# Altium PCB Light Control - 8-16 in 16-32 out.PcbDoc
Units mm, origin at the board's own origin, x right, y up, seen from the top; angles counter-clockwise.
Board outline 152.4 x 101.6 mm, 2 copper layers (Top Layer, Bottom Layer); 58 components, 41 nets, 190 pads, 30 vias.
Unrouted connection lines stored in the file: 1.
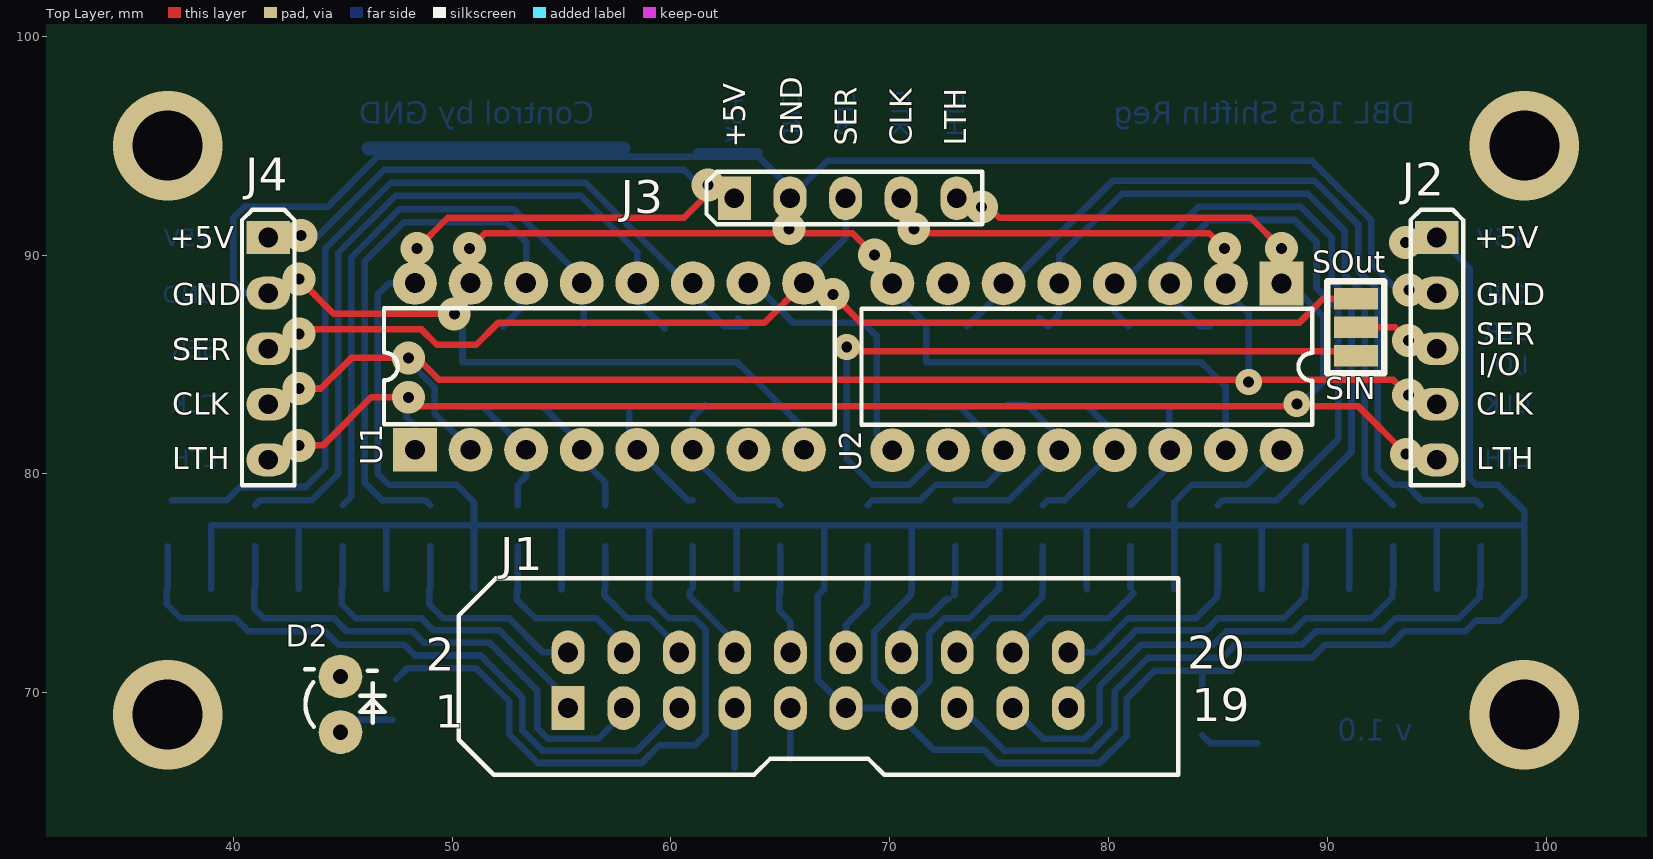
[diagram p0: Top Layer view]
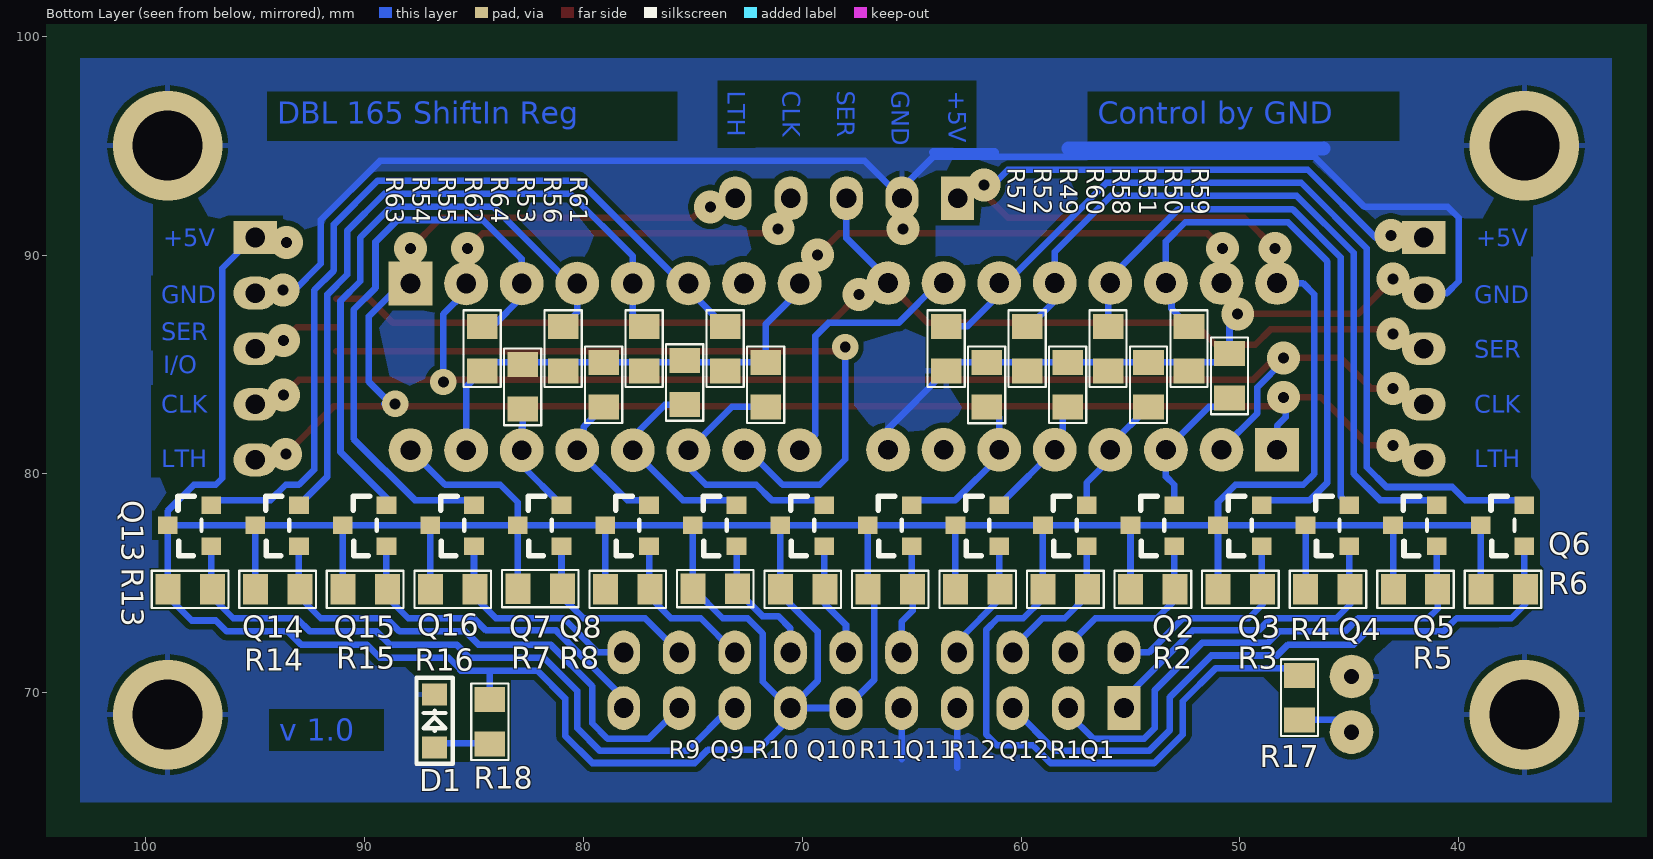
[diagram p1: Bottom Layer view, seen from below]
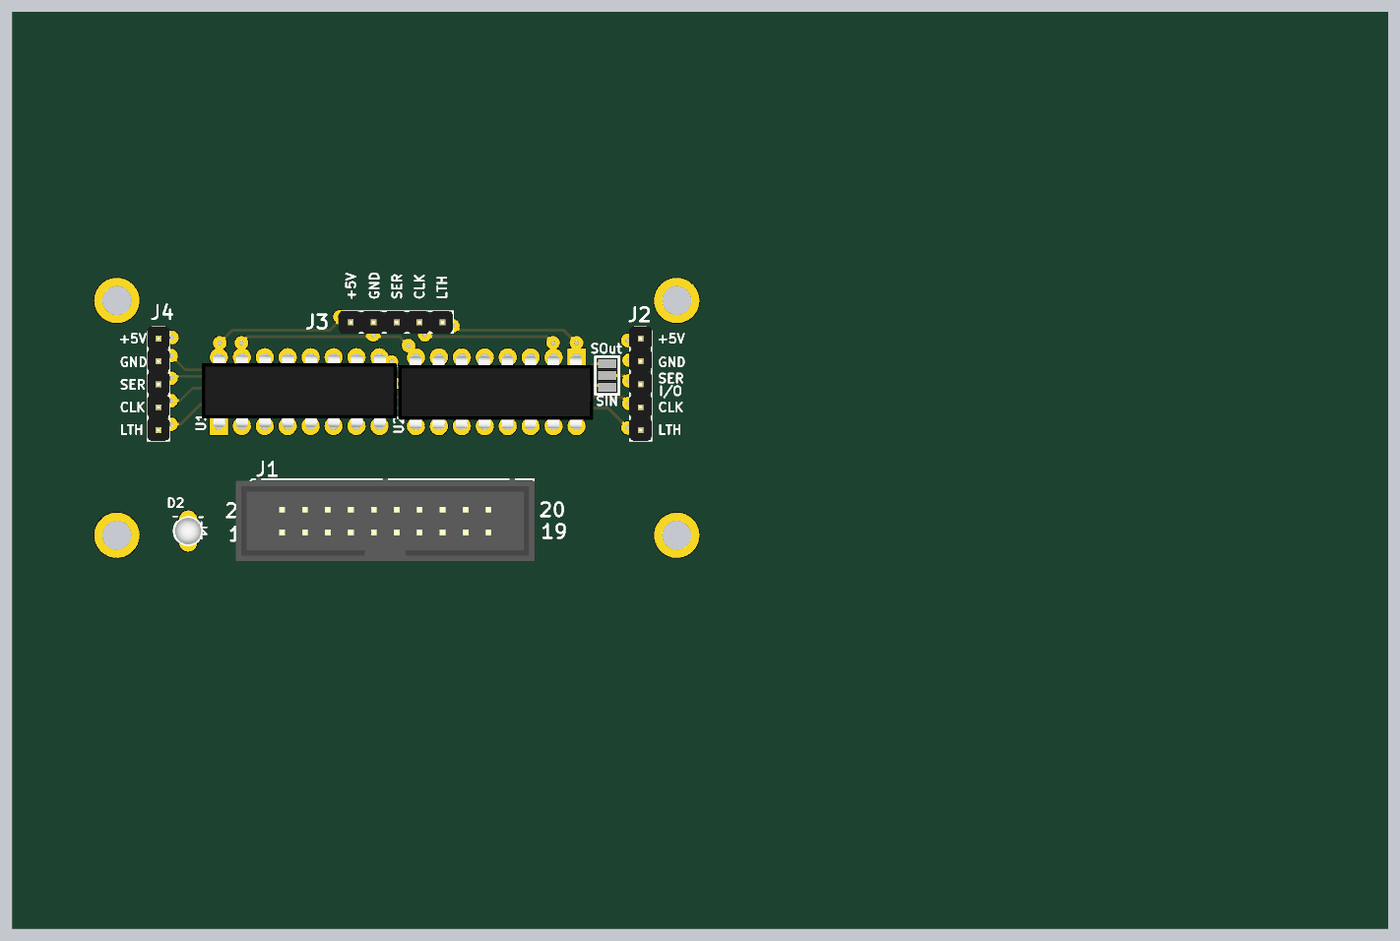
[diagram p2: 3D render of the assembled board from above, using the file's embedded part models]
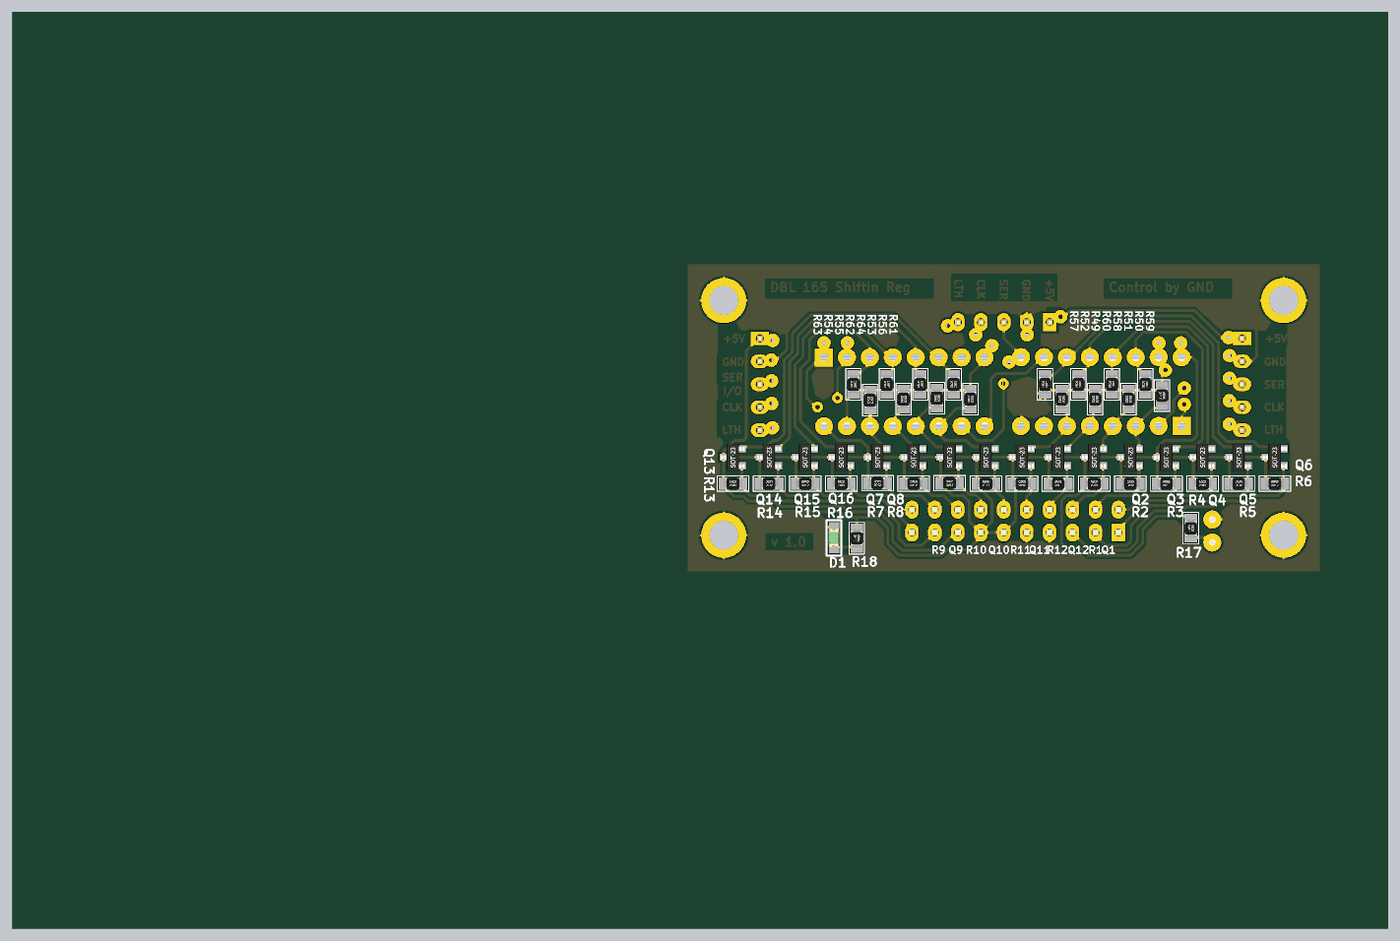
[diagram p3: 3D render of the assembled board from below, using the file's embedded part models]

## Layer stack, top to bottom
Top Solder: solder mask 0.0102, Solder Resist, Dk 3.5
Top Layer: signal copper 0.0356
Dielectric 1: dielectric 0.32, FR-4, Dk 4.8
Bottom Layer: signal copper 0.0356
Bottom Solder: solder mask 0.0102, Solder Resist, Dk 3.5

## Board outline
25.4,25.4 177.8,25.4 177.8,127 25.4,127

## Design rules (kind name [scope] priority, off if disabled: settings)
Clearance [All] p1: gap=0.254
ComponentClearance [All] p1: gap=0.1 collisioncheckmode=3 verticalgap=0.01 showdistances=FALSE
PolygonConnect [All] p1: connectstyle=Relief reliefconductorwidth=0.254 reliefentries=4 polygonreliefangle="90 Angle" airgapwidth=0.254
RoutingVias [All] p1: holewidth=0.711 width=1.27 viastyle="Through Hole" minholewidth=0.711 minwidth=1.27 maxholewidth=0.711 maxwidth=1.27
SolderMaskExpansion [All] p1: expansion=0.102
Width [All] p1: maxlimit=2 minlimit=0.2 preferedwidth=0.5
28 further rules are at their usual default settings.

## Components (designator, comment, footprint, x,y, rotation, side; value= is the part's Value field where it differs from the comment)
D1 "Green" "LED SMD 0805 Green" 86.8,67.5 r90 bottom
D2 "FYL-3014GD" "LED Round 3mm Green" 44.9,68.2 r90 top
J1 "Input Buttons/keys" "LINE 2.54 x 20D (2 x 10) - BH" 55.3,69.3 r90 top
J2 "Interface Connector" "Line 2.54 x 5" 95,90.8 r0 top
J3 "Interface Connector" "Line 2.54 x 5" 62.9,92.6 r90 top
J4 "Interface Connector" "Line 2.54 x 5" 41.6,90.8 r0 top
Q1 "BSS84" SOT-23 57,76.7 r90 bottom
Q2 "BSS84" SOT-23 53,76.7 r90 bottom
Q3 "BSS84" SOT-23 49,76.7 r90 bottom
Q4 "BSS84" SOT-23 45,76.7 r90 bottom
Q5 "BSS84" SOT-23 41,76.7 r90 bottom
Q6 "BSS84" SOT-23 37,76.7 r90 bottom
Q7 "BSS84" SOT-23 81,76.7 r90 bottom
Q8 "BSS84" SOT-23 77,76.7 r90 bottom
Q9 "BSS84" SOT-23 73,76.7 r90 bottom
Q10 "BSS84" SOT-23 69,76.7 r90 bottom
Q11 "BSS84" SOT-23 65,76.7 r90 bottom
Q12 "BSS84" SOT-23 61,76.7 r90 bottom
Q13 "BSS84" SOT-23 97,76.7 r90 bottom
Q14 "BSS84" SOT-23 93,76.7 r90 bottom
Q15 "BSS84" SOT-23 89,76.7 r90 bottom
Q16 "BSS84" SOT-23 85,76.7 r90 bottom
R1 "10kOm" "SMD 0805 (2012)" 59,74.7 r180 bottom
R2 "10kOm" "SMD 0805 (2012)" 55,74.7 r180 bottom
R3 "10kOm" "SMD 0805 (2012)" 51,74.7 r180 bottom
R4 "10kOm" "SMD 0805 (2012)" 47,74.7 r180 bottom
R5 "10kOm" "SMD 0805 (2012)" 43,74.7 r180 bottom
R6 "10kOm" "SMD 0805 (2012)" 39,74.7 r180 bottom
R7 "10kOm" "SMD 0805 (2012)" 83,74.734 r180 bottom
R8 "10kOm" "SMD 0805 (2012)" 79,74.7 r180 bottom
R9 "10kOm" "SMD 0805 (2012)" 75,74.734 r180 bottom
R10 "10kOm" "SMD 0805 (2012)" 71,74.7 r180 bottom
R11 "10kOm" "SMD 0805 (2012)" 67,74.7 r180 bottom
R12 "10kOm" "SMD 0805 (2012)" 63,74.7 r180 bottom
R13 "10kOm" "SMD 0805 (2012)" 99,74.7 r180 bottom
R14 "10kOm" "SMD 0805 (2012)" 95,74.7 r180 bottom
R15 "10kOm" "SMD 0805 (2012)" 91,74.7 r180 bottom
R16 "10kOm" "SMD 0805 (2012)" 87,74.7 r180 bottom
R17 "4.7k Om" "SMD 0805 (2012)" 47.3,70.8 r270 bottom
R18 "4.7k Om" "SMD 0805 (2012)" 84.3,69.7 r270 bottom
R49 "10kOm" "SMD 0805 (2012)" 59.7,84.7 r90 bottom
R50 "10kOm" "SMD 0805 (2012)" 52.3,84.7 r90 bottom
R51 "10kOm" "SMD 0805 (2012)" 54.2,85.1 r270 bottom
R52 "10kOm" "SMD 0805 (2012)" 61.6,85.091 r270 bottom
R53 "10kOm" "SMD 0805 (2012)" 75.4,85.2 r270 bottom
R54 "10kOm" "SMD 0805 (2012)" 82.8,85 r270 bottom
R55 "10kOm" "SMD 0805 (2012)" 80.9,84.7 r90 bottom
R56 "10kOm" "SMD 0805 (2012)" 73.5,84.7 r90 bottom
R57 "10kOm" "SMD 0805 (2012)" 63.4,84.7 r90 bottom
R58 "10kOm" "SMD 0805 (2012)" 56,84.7 r90 bottom
R59 "10kOm" "SMD 0805 (2012)" 50.5,85.5 r270 bottom
R60 "10kOm" "SMD 0805 (2012)" 57.9,85.1 r270 bottom
R61 "10kOm" "SMD 0805 (2012)" 71.7,85.1 r270 bottom
R62 "10kOm" "SMD 0805 (2012)" 79.1,85.1 r270 bottom
R63 "10kOm" "SMD 0805 (2012)" 84.6,84.7 r90 bottom
R64 "10kOm" "SMD 0805 (2012)" 77.2,84.7 r90 bottom
U1 "SN74HC165N" DIP-16 48.3,81.1 r0 top
U2 "SN74HC165N" DIP-16 87.9,88.7 r180 top

## Footprints (in the part's own frame and the unit in brackets; to place one, negate y for a bottom-side part, rotate by r counter-clockwise, add the part's x,y. Pads: shape width x height; smd on the part's side, far side on the other; paste and mask are expansions set on the pad)
DIP-16 [mm] "DIP; 16 Leads; Row Spacing 7.62 mm; Pitch 2.54 mm"
  rect 2x2 hole 0.9: 1(0,0)
  round 2 hole 0.9: 2(2.54,0) 3(5.08,0) 4(7.62,0) 5(10.16,0) 6(12.7,0) 7(15.24,0) 8(17.78,0) 9(17.78,7.62) 10(15.24,7.62) 11(12.7,7.62) 12(10.16,7.62) 13(7.62,7.62) 14(5.08,7.62) 15(2.54,7.62) 16(0,7.62)
  silkscreen extent -1.41,1.16 19.19,6.46, body extent -1.87,-0.05 19.72,7.83, height 4.19
"LED Round 3mm Green" [mm]
  round 2 hole 0.7: A(0,0) K(2.54,0)
  silkscreen extent 0.25,-2.03 2.88,1.63, body extent -0.39,-1.65 2.91,1.64, height 5.51
"LED SMD 0805 Green" [mm]
  rect 1x1.143 smd: A(0,0) K(2.425,0)
  silkscreen extent -0.75,-0.82 3.17,0.83, body extent 0.22,-0.62 2.24,0.63, height 1.1
"Line 2.54 x 5" [mm]
  rect 2x1.5 hole 0.9: 1(0,0)
  oval 2x1.5 hole 0.9: 2(0,-2.54) 3(0,-5.08) 4(0,-7.62) 5(0,-10.16)
  silkscreen extent -1.2,-11.32 1.2,1.28, body extent -1.25,-11.33 1.25,1.37, height 8.2
"LINE 2.54 x 20D (2 x 10) - BH" [mm]
  rect 2x1.5 hole 0.9: 1(0,0)
  oval 2x1.5 hole 0.9: 2(2.54,0) 3(0,-2.54) 4(2.54,-2.54) 5(0,-5.08) 6(2.54,-5.08) 7(0,-7.62) 8(2.54,-7.62) 9(0,-10.16) 10(2.54,-10.16) 11(0,-12.7) 12(2.54,-12.7) 13(0,-15.24) 14(2.54,-15.24) 15(0,-17.78) 16(2.54,-17.78) 17(0,-20.32) 18(2.54,-20.32) 19(0,-22.86) 20(2.54,-22.86)
  silkscreen extent -3.05,-27.87 5.92,5, body extent -3.18,-27.95 6.02,5.1, height 8.84
"SMD 0805 (2012)" [mil]
  rect 45x55 smd: 1(0.35,0.98) 2(80.35,0.98)
  silkscreen extent -29,-32 109,34, body extent 1,-24 80,26, height 18
SOT-23 [mm]
  rect 0.8x0.9 smd: 1(0,0) 2(1.875,0) 3(0.95,2)
  silkscreen extent -0.45,0.45 2.27,1.53, body extent -0.57,-0.32 2.43,2.32, height 1.08

## Part data
D1: library part "Led SMD Green", "?2v ?20mA"
D2: library part "Led Round 3mm Green", "2.1v 10mA, 15-30mCd"
J1: library part "PLD-20 (2 x 10)", "Vert, Dbl line, Male"
J2 J3 J4: library part PLS-5, "Vert, Sgl line, Male"
Q1 Q2 Q3 Q4 Q5 Q6 Q7 Q8 Q9 Q10 Q11 Q12 Q13 Q14 Q15 Q16: "P-Channel -50V - 10-1? - 0.13A"
R1 R2 R3 R4 R5 R6 R7 R8 R9 R10 R11 R12 R13 R14 R15 R16 R17 R18 R49 R50 R51 R52 R53 R54 R55 R56 R57 R58 R59 R60 R61 R62 R63 R64: library part "Res All Types"
U1 U2: "8-Bit Parallel-Load Shift Register"

## Free pads (board coordinates)
  rect 2x1 smd: 2(91.3,88) 3(91.3,85.4) 4(91.3,86.7)

## Via types
v1: diameter 1.5, hole 0.5, Top Layer to Bottom Layer, 23 vias
v2: diameter 5, hole 3.2, Top Layer to Bottom Layer, 4 vias
v3: diameter 1.2, hole 0.5, Top Layer to Bottom Layer, 3 vias

## Nets (pads, with @x,y where several pads share a name; then routed paths per layer and width w, separated by ;. In a path a pad name is that pad's centre, name@x,y a point inside that pad or via, vN(x,y) a via of type N, cw(c..) or ccw(c..) an arc to the next point about the centre after c; other vN are vias at no path point)
165TO165: U1.10 U2.9 | length 12.4
  Bottom Layer w0.3: U1.10 63.78,88.72 65.6,86.9 68.8,86.9 69.4,86.3 69.4,81.8 U2.9
+5V: J1.11 J1.13 J2.1 J3.1 J4.1 Q1.3 Q2.3 Q3.3 Q4.3 Q5.3 Q6.3 Q7.3 Q8.3 Q9.3 Q10.3 Q11.3 Q12.3 Q13.3 Q14.3 Q15.3 Q16.3 R1.1 R2.1 R3.1 R4.1 R5.1 R6.1 R7.1 R8.1 R9.1 R10.1 R11.1 R12.1 R13.1 R14.1 R15.1 R16.1 R17.1 R18.1 U1.16 U2.16 | length 265.9
  Top Layer w0.3: v1(48.4,90.3) 49.8,91.7 60.6,91.7 61.7,92.8 v1(61.7,93.2)
  Bottom Layer w0.3: R6.1@39,74.734 Q6.3 Q5.3 ; J4.1 43.8,90.8 46.9,93.9 60.6,93.9 61.7,92.8 v1(61.7,93.2) ; R5.1@43,74.734 Q5.3 ; R4.1@47,74.734 Q4.3 ; R17.1@47.45,70.616 47.957,71.123 51.093,71.123 52.609,69.608 52.609,68.091 53.9,66.8 53.912,66.8 53.924,66.788 58.651,66.788 59.463,67.6 61.1,67.6 61.6,68.1 61.6,72.867 61.067,73.4 59.9,73.4 58.991,74.309 R1.1 ; U1.16 47.12,88.72 46.6,88.2 46.6,80 47.1,79.5 50.2,79.5 51,78.7 Q3.3 ; R3.1@51,74.734 Q3.3 ; R2.1@55,74.734 Q2.3 ; R1.1@59,74.734 Q1.3 ; R12.1@63,74.734 Q12.3 ; R11.1 66.7,74.434 66.7,70.6 J1.11 70.1,69.3 72,67.4 74.3,67.4 74.912,66.788 79.588,66.788 80.837,68.037 80.837,69.737 82.1,71 84.3,71 ; R11.1@67,74.734 Q11.3 ; J1.13 69.3,70.54 69.3,72.8 70.991,74.491 R10.1 ; J1.13@70.7,69.4 71.8,70.5 71.8,72.7 72.5,73.4 73.632,73.4 R9.1 ; R10.1@71,74.734 Q10.3 ; R9.1@75,74.734 Q9.3 ; R8.1@79,74.734 Q8.3 ; R7.1@83,74.734 Q7.3 ; R18.1@84.275,70.091 84.275,70.975 84.3,71 ; R16.1@87,74.734 Q16.3 ; U2.16 86.32,79.5 83.8,79.5 83,78.7 Q7.3 ; R15.1@91,74.734 Q15.3 ; R14.1@95,74.734 Q14.3 ; J2.1@95,90.4 95.5,90.4 96.5,89.4 96.5,79.8 96.8,79.5 97.8,79.5 99,78.3 Q13.3 ; R13.1 98.991,74.391 97.9,73.3 96.8,73.3 96.3,72.8 93.5,72.8 92.9,72.2 89.9,72.2 89.3,71.6 86.157,71.6 85.624,71.067 85.624,71.025 85.6,71 84.3,71 ; R13.1@99,74.734 Q13.3 ; Q5.3 Q4.3 ; Q4.3 Q3.3 ; Q3.3 Q2.3 ; Q2.3 Q1.3 ; Q1.3 Q12.3 ; Q12.3 Q11.3 ; Q11.3 Q10.3 ; Q10.3 Q9.3 ; Q9.3 Q8.3 ; Q8.3 Q7.3 ; Q7.3 Q16.3 ; Q16.3 Q15.3 ; Q15.3 Q14.3 ; Q14.3 Q13.3
  other v1: 93.575,90.575 43.1,90.9
"BT 1": J1.5 Q6.1 R6.2 | length 30.5
  Bottom Layer w0.3: R6.2 36.959,74.041 37.6,73.4 40.1,73.4 40.7,72.8 44.2,72.8 44.8,72.2 47.8,72.2 48.3,71.7 51.3,71.7 53.2,69.8 53.2,68.295 54.153,67.342 58.422,67.342 J1.5 ; R6.2@37,74.766 Q6.1
"BT 2": J1.3 Q5.1 R5.2 | length 23.9
  Bottom Layer w0.3: R5.2 40.959,73.841 41.4,73.4 44.6,73.4 45.2,72.8 48.2,72.8 48.708,72.292 51.708,72.292 53.9,70.1 53.9,68.379 54.383,67.896 56.696,67.896 57.84,69.04 J1.3 ; R5.2@41,74.766 Q5.1
"BT 3": J1.1 Q4.1 R4.2 | length 15.2
  Bottom Layer w0.3: R4.2 44.959,74.041 45.6,73.4 48.6,73.4 49.154,72.846 52.154,72.846 55.3,69.7 J1.1 ; R4.2@45,74.766 Q4.1
"BT 4": J1.2 Q3.1 R3.2 | length 9.9
  Bottom Layer w0.3: R3.2 48.959,74.041 49.6,73.4 52.6,73.4 54.16,71.84 J1.2 ; R3.2@49,74.766 Q3.1
"BT 5": J1.4 Q2.1 R2.2 | length 8.9
  Bottom Layer w0.3: R2.2 52.959,74.241 53.8,73.4 56.6,73.4 57.8,72.2 J1.4@57.8,71.6 ; R2.2@53,74.541 Q2.1
"BT 6": J1.6 Q1.1 R1.2 | length 6.8
  Bottom Layer w0.3: R1.2 56.959,74.441 58,73.4 59.025,73.4 60.38,72.045 J1.6 ; R1.2@57,74.766 Q1.1
"BT 7": J1.8 Q12.1 R12.2 | length 5.6
  Bottom Layer w0.3: R12.2@60.859,74.625 60.859,74.391 62.92,72.33 J1.8 ; R12.2@61,74.766 Q12.1
"BT 8": J1.10 Q11.1 R11.2 | length 5.3
  Bottom Layer w0.3: R11.2 64.959,73.741 65.46,73.24 J1.10 ; R11.2@65,74.541 Q11.1
"BT 9": J1.12 Q10.1 R10.2 | length 5.2
  Bottom Layer w0.3: J1.12 68,73.1 68.959,74.059 R10.2 ; R10.2@69,74.766 Q10.1
"BT 10": J1.14 Q9.1 R9.2 | length 6.3
  Bottom Layer w0.3: J1.14 70.54,72.94 71.1,73.5 71.817,73.5 72.617,74.3 R9.2@72.7,74.3 ; J1.14@70.7,72.3 J1.14@71,72.3 ; R9.2@72.959,74.459 R9.2 ; R9.2@73,74.8 Q9.1
"BT 11": J1.16 Q8.1 R8.2 | length 7.2
  Bottom Layer w0.3: J1.16 74.64,73.4 76,73.4 76.959,74.359 R8.2 ; R8.2@77,74.766 Q8.1
"BT 12": J1.18 Q7.1 R7.2 | length 8.6
  Bottom Layer w0.3: J1.18 77.18,73.4 80,73.4 R7.2@81.159,74.559 ; R7.2@81,74.8 Q7.1
"BT 13": J1.20 Q16.1 R16.2 | length 10.1
  Bottom Layer w0.3: J1.20 79.34,71.84 80.9,73.4 84,73.4 84.959,74.359 R16.2 ; R16.2@85,74.766 Q16.1
"BT 14": J1.19 Q15.1 R15.2 | length 15.5
  Bottom Layer w0.3: J1.19 78.16,69.76 81.246,72.846 84.446,72.846 85,73.4 88,73.4 88.959,74.359 R15.2 ; R15.2@89,74.766 Q15.1
"BT 15": J1.17 Q14.1 R14.2 | length 23.9
  Bottom Layer w0.3: J1.17 77.024,67.896 78.896,67.896 79.6,68.6 79.6,70.3 81.5,72.2 84.8,72.2 85.4,72.8 88.4,72.8 89,73.4 92,73.4 92.959,74.359 R14.2 ; R14.2@93,74.766 Q14.1
"BT 16": J1.15 Q13.1 R13.2 | length 30.9
  Bottom Layer w0.3: J1.15 73.3,69.3 75.258,67.342 79.242,67.342 80.283,68.383 80.283,70.083 81.8,71.6 85.2,71.6 85.8,72.2 88.854,72.2 89.454,72.8 92.5,72.8 93.1,73.4 96,73.4 96.959,74.359 R13.2 ; R13.2@97,74.766 Q13.1
CLK165: J2.4 J3.4 J4.4 U1.2 U2.2 | length 76.6
  Top Layer w0.3: v1(43,83.9) 44,83.9 45.4,85.3 v1(48,85.3) ; v1@48.2,85.5 49.4,84.3 93,84.3 v1(93.7,83.6) ; v1(71.1,91.2) 71.3,91 84.6,91 v1(85.3,90.3)
  Bottom Layer w0.3: v1@47.975,85.188 49.2,83.963 49.2,82.771 50.84,81.131 U1.2 ; U2.2 85.36,88.34 86.4,87.3 v3(86.4,84.2)
GND: D1.K D2.K J1.7 J1.9 J2.2 J3.2 J4.2 R49.1 R50.1 R51.1 R52.1 R53.1 R54.1 R55.1 R56.1 R57.1 R58.1 R59.1 R60.1 R61.1 R62.1 R63.1 R64.1 U1.8 U1.15 U2.8 U2.15 | length 156.3
  Top Layer w0.3: v1(43,88.9) 44.584,87.316 49.436,87.316 U1.15 ; v1(50.8,90.3) 51.5,91 68.3,91 v1(69.3,90)
  Bottom Layer w0.3: J4.2 40.54,88.26 40,88.8 40,91.7 40.5,92.2 44.3,92.2 46.6,94.5 64,94.5 65.44,93.06 J3.2 67.14,94.3 89.3,94.3 92,91.6 92,89.6 v1@93.3,88.3 ; U1.15@50.475,87.825 50.475,85.091 R51.1 R60.1 63.043,85.091 R57.1 66.08,82.054 U1.8 ; U1.15@50.84,88.035 U1.15 ; 62.92,66.57 J1.7 ; 65.46,66.96 J1.9 ; U2.8@70.12,89.38 U2.8 70.12,88.38 71.675,86.825 R61.1 R62.1 84.243,85.091 R63.1 85.36,83.974 U2.15 U2.15@85.36,81.79
  Bottom Layer w0.4: 61.2,94.7 64,94.7
  Bottom Layer w0.65: 46.191,94.873 57.827,94.873
  other v1: 50.1,87.3 93.725,88.4 65.4,91.2
  other v2: 37,69 99,69 37,95 99,95
"IN 1": Q6.2 R57.2 U1.11 | length 41.6
  Bottom Layer w0.3: Q6.2@37.2,78.8 39.7,78.8 40.3,79.4 43.3,79.4 44.2,80.3 44.2,90.3 47.2,93.3 56.1,93.3 60.68,88.72 U1.11 61,88.2 62.459,86.741 R57.2 R57.2@63.066,87.1
"IN 2": Q5.2 R49.2 U1.12 | length 34.3
  Bottom Layer w0.3: Q5.2 41.225,78.8 43.6,78.8 44.8,80 44.8,90.1 47.4,92.7 55.9,92.7 58.46,90.14 U1.12 58.46,87.906 59.725,86.641 R49.2@59.725,86.655
"IN 3": Q4.2 R58.2 U1.13 | length 26.4
  Bottom Layer w0.3: Q4.2 45.4,78.975 45.4,89.9 47.6,92.1 52.8,92.1 55.92,88.98 U1.13 ; R58.2@56.025,86.841 U1.13@56.025,88.72
"IN 4": Q3.2 R50.2 U1.14 | length 26.3
  Bottom Layer w0.3: Q3.2 48.775,78.8 46.8,78.8 46,79.6 46,89.7 47.8,91.5 52.5,91.5 53.38,90.62 U1.14 53.125,88.465 53.125,87.541 R50.2
"IN 5": Q2.2 R59.2 U1.3 | length 6.5
  Bottom Layer w0.3: R59.2@50.621,83.059 50.475,83.059 51.421,83.059 U1.3 53.38,79.88 53,79.5 Q2.2
"IN 6": Q1.2 R51.2 U1.4 | length 5.7
  Bottom Layer w0.3: R51.2 55.92,81.314 U1.4 55.92,80.68 57,79.6 Q1.2
"IN 7": Q12.2 R60.2 U1.5 | length 5.5
  Bottom Layer w0.3: U1.5@58.1,81.056 R60.2@58.1,82.8 ; U1.5@58.675,81.315 U1.5 60.76,78.8 Q12.2@61,78.8
"IN 8": Q11.2 R52.2 U1.6 | length 7.5
  Bottom Layer w0.3: R52.2@61.575,83.159 61,82.584 U1.6 61,80.8 63,78.8 64.775,78.8 Q11.2
"IN 9": Q10.2 R61.2 U2.11 | length 12
  Bottom Layer w0.3: Q10.2 69.225,78.8 71.4,78.8 72.1,79.5 74.4,79.5 75.2,80.3 U2.11 73.221,83.059 R61.2
"IN 10": Q9.2 R53.2 U2.12 | length 9.3
  Bottom Layer w0.3: Q9.2@73,78.8 75.46,78.8 U2.12 77.74,81.694 76.275,83.159 R53.2
"IN 11": Q8.2 R62.2 U2.13 | length 6.8
  Bottom Layer w0.3: Q8.2 77.225,78.8 78,78.8 U2.13 79.975,81.385 79.975,82.159 R62.2
"IN 12": Q7.2 R54.2 U2.14 | length 5.2
  Bottom Layer w0.3: Q7.2 82.82,80.395 U2.14 82.82,82.104 82.775,82.059 R54.2
"IN 13": Q16.2 R63.2 U2.3 | length 28.1
  Bottom Layer w0.3: R63.2 84.159,86.741 82.82,88.08 U2.3 82.82,89.82 84.6,91.6 88.5,91.6 89.5,90.6 89.5,88.5 90.5,87.5 90.5,81.6 87.7,78.8 85.225,78.8 Q16.2
"IN 14": Q15.2 R55.2 U2.4 | length 27.5
  Bottom Layer w0.3: R55.2 80.28,87.386 U2.4 80.6,88.7 84.1,92.2 88.8,92.2 90.2,90.8 90.2,88.8 91.1,87.9 91.1,81 Q15.2@88.838,78.738
"IN 15": Q14.2 R64.2 U2.5 | length 32.3
  Bottom Layer w0.3: R64.2@76.84,87.126 R64.2 77.74,87.256 U2.5 77.74,89.94 80.6,92.8 89.1,92.8 90.8,91.1 90.8,89.1 91.7,88.2 91.7,79.875 Q14.2
"IN 16": Q13.2 R56.2 U2.6 | length 38.6
  Bottom Layer w0.3: R56.2 75.2,88.416 U2.6 75.5,88.7 80.2,93.4 89.4,93.4 91.4,91.4 91.4,89.3 92.3,88.4 92.3,80.2 93,79.5 93.6,79.5 94.3,78.8 96.775,78.8 Q13.2
LATCH165: J2.5 J3.5 J4.5 U1.1 U2.1 | length 78.3
  Top Layer w0.3: v1(43,81.3) 44.1,81.3 46.3,83.5 v1(48,83.5) 48.4,83.1 91.4,83.1 v1(93.6,80.9) ; v1(74.2,92.2) 74.35,92.35 75,91.7 86.5,91.7 v1(87.9,90.3)
  Bottom Layer w0.3: v1(48,83.5) 47.8,83.5 47.9,83.4 47.9,82.6 48.3,82.2 U1.1 ; U2.1@87.9,87.95 U2.1 88.3,88.7 89.8,87.2 89.8,84.2 v3@88.7,83.1 ; v3(88.6,83.2) v3@89.1,83.2
NetD1_A: D1.A R18.2 | length 2.7
  Bottom Layer w0.3: R18.2@84.275,68.059 84.634,67.7 D1.A@86.8,67.7
NetD2_A: D2.A R17.2 | length 2.2
  Bottom Layer w0.3: D2.A@45.075,68.8 45.116,68.759 R17.2
"SERIAL IN": pad.3 U2.10 | length 34.3
  Top Layer w0.3: v3(68.035,85.8) 68.235,85.6 pad.3@91.3,85.6
  Bottom Layer w0.3: v3@68.035,85.9 v3(68.035,85.8) 68.035,80.665 69.2,79.5 70.9,79.5 72.48,81.08 U2.10
SERIALOUT165: J2.3 J3.3 J4.3 pad.2 pad.4 U1.9 | length 57.3
  Top Layer w0.3: v1@42.7,86.1 43.2,86.6 48.6,86.6 49.3,85.9 51.1,85.9 52.1,86.9 64.26,86.9 U1.9 ; v1(67.4,88.2) 68.7,86.9 88.7,86.9 89.8,88 pad.2 ; pad.4 93.1,86.7 v1(93.7,86.1)
  Bottom Layer w0.3: U1.9 66.08,88.88 67.98,90.78 J3.3
  other v1: 43,86.4
pads on no net: U1.7 U2.7

## Polygon pours and split planes (outlines as drawn)
GND on Bottom Layer "Top Layer-No Net" (solid, pour order 2): 33,99 103,99 103,65 33,65

## Other copper
Bottom Layer:
  text "+5V" at 63.3,97.5 h0.8 r90
  text "GND" at 65.9,97.5 h0.8 r90
  text "SER" at 68.4,97.5 h0.8 r90
  text "CLK" at 70.9,97.5 h0.8 r90
  text "LTH" at 73.4,97.5 h0.8 r90
  text "Control by GND" at 56.5,96 h1
  text "DBL 165 ShiftIn Reg" at 94,96 h1
  text "+5V" at 39.2,90.4 h0.8
  text "+5V" at 99.2,90.4 h0.8
  text "GND" at 39.3,87.8 h0.8
  text "GND" at 99.3,87.8 h0.8
  text "SER" at 99.3,86.1 h0.8
  text "SER" at 39.3,85.3 h0.8
  text "I/O" at 99.2,84.6 h0.8
  text "CLK" at 39.3,82.8 h0.8
  text "CLK" at 99.3,82.8 h0.8
  text "LTH" at 39.3,80.3 h0.8
  text "LTH" at 99.3,80.3 h0.8
  text "v 1.0" at 93.9,67.8 h1

## Silkscreen, mask and mechanical layers (free items; w line width, h text height)
Top Overlay:
  lines w0.3: 90,84.6 90,88.8 92.6,88.8 92.6,84.6 90,84.6
  text "GND" at 66,95 h1 r90
  text "SER" at 68.5,95 h1 r90
  text "CLK" at 71,95 h1 r90
  text "LTH" at 73.5,95 h1 r90
  text "+5V" at 63.4,94.9 h1 r90
  text "+5V" at 37.1,90.3 h1
  text "+5V" at 96.7,90.3 h1
  text "SOut" at 89.3,89.2 h1
  text "GND" at 37.2,87.7 h1
  text "GND" at 96.8,87.7 h1
  text "SER" at 96.8,85.9 h1
  text "SER" at 37.2,85.2 h1
  text "I/O" at 96.9,84.5 h1
  text "SIN" at 89.9,83.4 h1
  text "CLK" at 37.2,82.7 h1
  text "CLK" at 96.8,82.7 h1
  text "LTH" at 37.2,80.2 h1
  text "LTH" at 96.8,80.2 h1

## Text inside footprints (layer, text, board x,y; h text height)
J1: Top Overlay "20" at 83.6,71.1 h1.52; Top Overlay "19" at 83.8,68.7 h1.52; Top Overlay "2" at 48.8,71 h1.52; Top Overlay "1" at 49.2,68.4 h1.52